# EAGLE board CT_schematic (EAGLE 7.6.0)

Size 100 x 80 mm. Coordinates in mm from the lower left corner, seen from the top.
Outline: 0,0 100,0 100,80 0,80 0,0
Copper layers (1*16): Top 0.035mm / dielectric 1.5mm / Bottom 0.035mm
Design rules "default": minimum track width 10mil, minimum drill 24mil, track to track 8mil, track to pad 8mil, pad to pad 8mil, via to via 8mil, smd to smd 8mil, copper to edge 40mil, drill to drill 8mil, minimum pad ring 10mil, minimum via ring 8mil, stop-mask expansion 4mil, vias tented up to drill 0mil, thermal gap 10mil

## Footprints (pad centres in the part's own frame; a part is rotated, then mirrored left to right if it is on the bottom)
C0603 = smd 0.8 x 0.8: 1 -0.762,0; 2 0.762,0
C0402 = smd 0.5 x 0.5: 1 -0.508,0; 2 0.508,0
C1210 = smd 1.2 x 2.5: 1 -1.524,0; 2 1.524,0
C0805 = smd 1.2 x 1.3: 1 -1.016,0; 2 1.016,0
C1206 = smd 1.3 x 1.6: 1 -1.524,0; 2 1.524,0
L0603 = smd 0.8 x 0.8: 1 -0.762,0; 2 0.762,0
DR1040 = smd 1.6 x 3.2: 1 -4.458,0; 2 4.458,0
R0603 = smd 0.8 x 0.8: 1 -0.762,0; 2 0.762,0
LQFP48 = smd 0.3 x 1.2: 1 -2.75,-4.25; 2 -2.25,-4.25; 3 -1.75,-4.25; 4 -1.25,-4.25; 5 -0.75,-4.25; 6 -0.25,-4.25; 7 0.25,-4.25; 8 0.75,-4.25; 9 1.25,-4.25; 10 1.75,-4.25; 11 2.25,-4.25; 12 2.75,-4.25; 25 2.75,4.25; 26 2.25,4.25; 27 1.75,4.25; 28 1.25,4.25; 29 0.75,4.25; 30 0.25,4.25; 31 -0.25,4.25; 32 -0.75,4.25; 33 -1.25,4.25; 34 -1.75,4.25; 35 -2.25,4.25; 36 -2.75,4.25 | smd 1.2 x 0.3: 13 4.25,-2.75; 14 4.25,-2.25; 15 4.25,-1.75; 16 4.25,-1.25; 17 4.25,-0.75; 18 4.25,-0.25; 19 4.25,0.25; 20 4.25,0.75; 21 4.25,1.25; 22 4.25,1.75; 23 4.25,2.25; 24 4.25,2.75; 37 -4.25,2.75; 38 -4.25,2.25; 39 -4.25,1.75; 40 -4.25,1.25; 41 -4.25,0.75; 42 -4.25,0.25; 43 -4.25,-0.25; 44 -4.25,-0.75; 45 -4.25,-1.25; 46 -4.25,-1.75; 47 -4.25,-2.25; 48 -4.25,-2.75
TST-110-05-T-D-RA = drill 1 pad 1.7 square: 1 0,0 | drill 1 pad 1.7: 2 0,2.54; 3 2.54,0; 4 2.54,2.54; 5 5.08,0; 6 5.08,2.54; 7 7.62,0; 8 7.62,2.54; 9 10.16,0; 10 10.16,2.54; 11 12.7,0; 12 12.7,2.54; 13 15.24,0; 14 15.24,2.54; 15 17.78,0; 16 17.78,2.54; 17 20.32,0; 18 20.32,2.54; 19 22.86,0; 20 22.86,2.54
TDFN-8/6MM = smd 0.3 x 0.75: 1 0,0; 2 0.5,0; 3 1,0; 4 1.5,0; 5 1.5,3; 6 1,3; 7 0.5,3; 8 0,3
FCI_10118193-0001LF = smd 0.4 x 1.35: 1 -1.3,2.675; 2 -0.65,2.675; 3 0,2.675; 4 0.65,2.675; 5 1.3,2.675 | smd 1.6 x 1.4: 6 -3.2,2.45; 7 3.2,2.45 | smd 1.9 x 1.9: 8 -1.2,0; 9 1.2,0 | hole 0.5: -3.3,0; 3.3,0
SOT143B = smd 1 x 0.7: 1 -0.75,-1 | smd 0.6 x 0.7: 2 0.95,-1; 3 0.95,1; 4 -0.95,1
QFN-28 = smd 0.813 x 0.305: 1 -2.451,1.5; 2 -2.451,1; 3 -2.451,0.5; 4 -2.451,0; 5 -2.451,-0.5; 6 -2.451,-1; 7 -2.451,-1.5; 15 2.451,-1.5; 16 2.451,-1; 17 2.451,-0.5; 18 2.451,0; 19 2.451,0.5; 20 2.451,1; 21 2.451,1.5 | smd 0.305 x 0.813: 8 -1.5,-2.451; 9 -1,-2.451; 10 -0.5,-2.451; 11 0,-2.451; 12 0.5,-2.451; 13 1,-2.451; 14 1.5,-2.451; 22 1.5,2.451; 23 1,2.451; 24 0.5,2.451; 25 0,2.451; 26 -0.5,2.451; 27 -1,2.451; 28 -1.5,2.451 | smd 3.607 x 3.607: 29 0,0
SJ-43515TS-SMT-TR = smd 2.2 x 3: 1 0.6,-7.4; 4 3.4,-7.4 | smd 3 x 3: 2 12.8,-7.4; 5 17,-3 | smd 2 x 3: 3 5.3,0; 6 2.5,0 | drill 1.8: P$7 4.5,-3.69; P$8 11.54,-3.69
ABS07-32.768KHZ-7-T = smd 1.1 x 2.4: 1 -2.5,0; 2 0,0
ABLS-25.000MHZ-B2F-T = smd 5.6 x 2.8: 1 -3.81,0; 2 5.69,0
ABLS-12.288MHZ-B4-T = smd 5.6 x 2.8: 1 -3.81,0; 2 5.69,0
TSOT-23-5 = smd 1.3 x 0.62: 1 -1.31,0.95; 2 -1.31,0; 3 -1.31,-0.95; 4 1.31,-0.95; 5 1.31,0.95
DFN8_2X3MC = smd 0.813 x 0.305: 1 -1.398,0.75; 2 -1.398,0.25; 3 -1.398,-0.25; 4 -1.398,-0.75; 5 1.398,-0.75; 6 1.398,-0.25; 7 1.398,0.25; 8 1.398,0.75 | smd 1.753 x 1.549: 9 0,0
JST-2-SMD = smd 1 x 4.6: 1 -1,-3.7; 2 1,-3.7 | smd 1.6 x 3.4: NC1 -3.4,1.5; NC2 3.4,1.5
SON-6 = smd 0.55 x 0.3: 1 -0.355,0.5 | smd 0.52 x 0.3: 2 -0.37,0; 3 -0.37,-0.5; 4 0.37,-0.5; 5 0.37,0; 6 0.37,0.5
SW_4-1437565-2 = smd 1.4 x 2.1: 1 -2.23,4.55; 2 -2.23,-4.55; 3 2.23,4.55; 4 2.23,-4.55
LGM67K-G1J2-24-Z = smd 0.8 x 1.4: A -2,0; C 0,0
NC7SZ125M5X = smd 1.3 x 0.7: 1 -1.3,0.95; 2 -1.3,0; 3 -1.3,-0.95; 4 1.3,-0.95; 5 1.3,0.95

## Placement (x,y rotation side)
C1  1e-07  [C0603]  -33.02,66.04 0 top  (outside the outline)
C2  1e-07  [C0603]  -36.83,66.04 0 top  (outside the outline)
C3  1e-07  [C0603]  -40.64,66.04 0 top  (outside the outline)
C4  1e-07  [C0603]  -44.45,66.04 0 top  (outside the outline)
C5  4.7e-06  [C0603]  -29.21,66.04 0 top  (outside the outline)
C6  1e-07  [C0603]  -48.26,66.04 0 top  (outside the outline)
C7  1e-08  [C0603]  -52.07,66.04 0 top  (outside the outline)
C8  1e-06  [C0603]  -55.88,66.04 0 top  (outside the outline)
C9  1e-11  [C0402]  -39.37,71.12 0 top  (outside the outline)
C10  1e-11  [C0402]  -43.18,71.12 0 top  (outside the outline)
C11  1e-11  [C0402]  -46.99,71.12 0 top  (outside the outline)
C12  1e-11  [C0402]  -50.8,71.12 0 top  (outside the outline)
C13  1e-07  [C0402]  -54.61,71.12 0 top  (outside the outline)
C14  1e-07  [C0402]  -58.42,71.12 0 top  (outside the outline)
C15  1e-08  [C0402]  -62.23,71.12 0 top  (outside the outline)
C16  2.2e-05  [C1210]  -38.1,48.26 0 top  (outside the outline)
C17  2.2e-05  [C1210]  -44.45,48.26 0 top  (outside the outline)
C18  1e-09  [C0402]  -66.04,71.12 0 top  (outside the outline)
C19  1e-09  [C0402]  -69.85,71.12 0 top  (outside the outline)
C20  1e-07  [C0402]  -73.66,71.12 0 top  (outside the outline)
C21  1e-07  [C0402]  -15.24,76.2 0 top  (outside the outline)
C22  1e-07  [C0402]  -19.05,76.2 0 top  (outside the outline)
C23  1e-07  [C0402]  -22.86,76.2 0 top  (outside the outline)
C24  1e-07  [C0402]  -26.67,76.2 0 top  (outside the outline)
C25  1e-05  [C0805]  -74.93,48.26 0 top  (outside the outline)
C26  1e-05  [C0805]  -15.24,55.88 0 top  (outside the outline)
C27  1e-05  [C0805]  -20.32,55.88 0 top  (outside the outline)
C28  1e-05  [C0805]  -25.4,55.88 0 top  (outside the outline)
C29  1e-05  [C0805]  -30.48,55.88 0 top  (outside the outline)
C30  2.2e-11  [C0402]  -31.75,71.12 0 top  (outside the outline)
C31  2.2e-11  [C0402]  -35.56,71.12 0 top  (outside the outline)
C32  1e-05  [C0805]  -35.56,55.88 0 top  (outside the outline)
C33  1e-05  [C0805]  -40.64,55.88 0 top  (outside the outline)
C34  1e-07  [C0402]  -30.48,76.2 0 top  (outside the outline)
C35  1e-05  [C1206]  -50.8,48.26 0 top  (outside the outline)
C36  1e-05  [C1206]  -57.15,48.26 0 top  (outside the outline)
C37  1e-08  [C0402]  -34.29,76.2 0 top  (outside the outline)
C38  1e-08  [C0402]  -38.1,76.2 0 top  (outside the outline)
F1  240.0  [L0603]  -59.69,66.04 0 top  (outside the outline)
I1  3.8e-06  [DR1040]  -38.1,20.32 0 top  (outside the outline)
R1  10000.0  [R0603]  -73.66,55.88 0 top  (outside the outline)
R2  1000.0  [R0603]  -63.5,66.04 0 top  (outside the outline)
R3  1600.5  [R0603]  -67.31,66.04 0 top  (outside the outline)
R4  4700.0  [R0603]  -71.12,66.04 0 top  (outside the outline)
R5  2200.0  [R0603]  -74.93,66.04 0 top  (outside the outline)
R6  2200.0  [R0603]  -15.24,71.12 0 top  (outside the outline)
R7  10000.0  [R0603]  -15.24,60.96 0 top  (outside the outline)
R8  10000.0  [R0603]  -20.32,60.96 0 top  (outside the outline)
R9  10000.0  [R0603]  -25.4,60.96 0 top  (outside the outline)
R10  10000.0  [R0603]  -30.48,60.96 0 top  (outside the outline)
R11  10000.0  [R0603]  -35.56,60.96 0 top  (outside the outline)
R12  10000.0  [R0603]  -40.64,60.96 0 top  (outside the outline)
R13  10000.0  [R0603]  -45.72,60.96 0 top  (outside the outline)
R14  10000.0  [R0603]  -50.8,60.96 0 top  (outside the outline)
R15  10000.0  [R0603]  -55.88,60.96 0 top  (outside the outline)
R16  10000.0  [R0603]  -60.96,60.96 0 top  (outside the outline)
R17  47000.0  [R0603]  -66.04,60.96 0 top  (outside the outline)
R18  47000.0  [R0603]  -71.12,60.96 0 top  (outside the outline)
R19  47000.0  [R0603]  -76.2,60.96 0 top  (outside the outline)
R20  680.0  [R0603]  -19.05,71.12 0 top  (outside the outline)
R21  220000.0  [R0603]  -58.42,55.88 0 top  (outside the outline)
R22  1000000.0  [R0603]  -53.34,55.88 0 top  (outside the outline)
R23  10000.0  [R0603]  -15.24,66.04 0 top  (outside the outline)
R24  10000.0  [R0603]  -20.32,66.04 0 top  (outside the outline)
R25  9100.0  [R0603]  -22.86,71.12 0 top  (outside the outline)
R26  680000.0  [R0603]  -63.5,55.88 0 top  (outside the outline)
R27  120000.0  [R0603]  -68.58,55.88 0 top  (outside the outline)
R28  2000.0  [R0603]  -26.67,71.12 0 top  (outside the outline)
R29  10000.0  [R0603]  -25.4,66.04 0 top  (outside the outline)
U1  STM32L152CCT6  [LQFP48]  -69.85,20.32 0 top  (outside the outline)
U2  TST-110-05-T-D-RA  [TST-110-05-T-D-RA]  -72.39,29.21 0 top  (outside the outline)
U3  24AA64T-I/MNY  [TDFN-8/6MM]  -24.13,31.75 0 top  (outside the outline)
U4  10118193-0001LF  [FCI_10118193-0001LF]  -33.02,31.75 0 top  (outside the outline)
U5  prtr5v0u2ax  [SOT143B]  -50.8,76.2 0 top  (outside the outline)
U6  WM8731CLSEFL  [QFN-28]  -30.48,49.53 0 top  (outside the outline)
U7  SJ-43515TS-SMT-TR  [SJ-43515TS-SMT-TR]  -39.37,10.16 0 top  (outside the outline)
U8  SJ-43515TS-SMT-TR  [SJ-43515TS-SMT-TR]  -67.31,10.16 0 top  (outside the outline)
U9  ABS07-32.768KHZ-7-T  [ABS07-32.768KHZ-7-T]  -69.85,41.91 0 top  (outside the outline)
U10  ABLS-25.000MHZ-B2F-T  [ABLS-25.000MHZ-B2F-T]  -26.67,41.91 0 top  (outside the outline)
U11  ABLS-12.288MHZ-B4-T  [ABLS-12.288MHZ-B4-T]  -46.99,41.91 0 top  (outside the outline)
U12  ltc3406es5  [TSOT-23-5]  -45.72,54.61 0 top  (outside the outline)
U13  MCP73831T-2ACI/MC  [DFN8_2X3MC]  -60.96,74.93 0 top  (outside the outline)
U14  S2B-PH-SM4-TB(LF)(SN)  [JST-2-SMD]  -53.34,21.59 0 top  (outside the outline)
U15  TPS3895ADRYR  [SON-6]  -54.61,74.93 0 top  (outside the outline)
U16  4-1437565-2  [SW_4-1437565-2]  -27.94,21.59 0 top  (outside the outline)
U17  Q65110A2395  [LGM67K-G1J2-24-Z]  -17.78,49.53 0 top  (outside the outline)
U18  nc7sz125m5x  [NC7SZ125M5X]  -62.23,48.26 0 top  (outside the outline)
U19  nc7sz125m5x  [NC7SZ125M5X]  -68.58,48.26 0 top  (outside the outline)

## Library data of the parts
C1-C38 F1 I1 R1-R29 U1-U19 = circuit_tree

## Nets
CLK_CRYSTAL_U1_3: C9.1 U1.3 U9.1
CLK_CRYSTAL_U1_4: C10.1 U1.4 U9.2
CLK_CRYSTAL_U1_5: C11.1 U1.5 U10.1
CLK_CRYSTAL_U1_6: C12.1 U1.6 U10.2
CLK_CRYSTAL_U6_1: C30.1 U6.1 U11.1
CLK_CRYSTAL_U6_2: C31.1 U6.2 U11.2
GND: C1.2 C2.2 C3.2 C4.2 C5.2 C6.2 C7.2 C8.2 C9.2 C10.2 C11.2 C12.2 C13.2 C14.2 C15.2 C19.2 C20.2 C21.2 C22.2 C23.2 C24.2 C25.2 C26.2 C27.2 C28.2 C29.2 C30.2 C31.2 C32.2 C33.1 C33.2 C34.2 C35.2 C36.2 C37.2 C38.2 R2.2 R7.2 R13.2 R15.2 R16.2 R17.2 R18.2 R19.2 R21.2 R25.2 R27.2 R28.2 U1.8 U1.23 U1.35 U1.47 U2.4 U2.6 U2.8 U2.10 U2.12 U2.14 U2.16 U2.18 U2.20 U3.4 U4.5 U4.6 U4.7 U4.8 U4.9 U5.1 U6.4 U6.15 U6.19 U6.25 U6.26 U6.29 U7.1 U8.1 U12.2 U13.6 U13.9 U14.2 U15.2 U17.C U18.2 U18.3 U19.1 U19.3
INPUT_USBPOWER_5V: C35.1 R29.2 U4.1 U5.4 U13.1 U13.2
NET_U1_1: C6.1 U1.1
NET_U1_7: R4.1 U1.7 U19.4
NET_U1_9: C7.1 C8.1 F1.1 U1.9
NET_U1_42: R5.1 U1.42 U3.6
NET_U1_43: R6.1 U1.43 U3.5
NET_U1_44: R7.1 U1.44
NET_U1_45: R3.1 U1.45 U17.A
NET_U1_46: R1.1 U1.46 U16.3 U16.4
NET_U2_19: R13.1 U2.19
NET_U3_1: R14.1 U3.1
NET_U3_2: R15.1 U3.2
NET_U3_3: R16.1 U3.3
NET_U6_9: U6.9
NET_U6_20: C24.1 C29.1 U6.20
NET_U7_2: C17.1 R18.1 U7.2
NET_U7_5: C16.1 R17.1 U7.5
NET_U7_13: C16.2
NET_U7_14: C17.2
NET_U8_5: C18.1 C19.1 R19.1 R20.1 U8.5
NET_U8_21: R20.2
NET_U8_22: C18.2
NET_U12_1: U12.1
NET_U12_3: I1.1 U12.3
NET_U12_5: R21.1 R22.1 U12.5
NET_U12_ATNET_3: I1.2 R22.2
NET_U13_5: R29.1 U13.5
NET_U13_8: R28.1 U13.8
NET_U15_1: R24.1 R25.1 U15.1
NET_U15_3: R26.2 R27.1 U15.3
NET_U15_4: R23.1 U15.4 U18.4 U19.2
NET_U16_1: R2.1 U16.1 U16.2
PROC_I2S2_CK: U1.26 U6.7
PROC_I2S2_SD: U1.28 U6.8
PROC_I2S2_WS: U1.25 U6.9 U6.11
PROC_SYS_JTCK_SWCLK: R11.1 U1.37 U2.9
PROC_SYS_JTDI: R9.1 U1.38 U2.5
PROC_SYS_JTDO_TRACESWO: U1.39 U2.13
PROC_SYS_JTMS_SWDIO: R10.1 U1.34 U2.7
PROC_SYS_JTRST: R8.1 U1.40 U2.3
PROC_USB_DM: U1.32 U4.2 U5.3
PROC_USB_DP: U1.33 U4.3 U5.2
RST_OUT_U2_SRESET_B: R12.1 U2.15 U18.1
VCC_S1_3V7: C32.1 C36.1 U12.4 U13.3 U13.4 U14.1
VCC_TIER1_3V3: C1.1 C2.1 C3.1 C4.1 C5.1 C13.1 C14.1 C15.1 C20.1 C21.1 C22.1 C23.1 C25.1 C26.1 C27.1 C28.1 C33.2 C34.1 C37.1 C38.1 F1.2 I1.2 R1.2 R3.2 R4.2 R5.2 R6.2 R8.2 R9.2 R10.2 R11.2 R12.2 R14.2 R22.2 R23.2 R24.2 R26.1 U1.24 U1.36 U1.48 U2.1 U2.2 U3.7 U3.8 U6.3 U6.5 U6.12 U6.18 U15.6 U18.5 U19.5

## Tracks (layer width: path | path; a pad name or v marks a point on that pad's centre or on a via)
CLK_CRYSTAL_U1_3  (2 unrouted)
CLK_CRYSTAL_U1_4  (2 unrouted)
CLK_CRYSTAL_U1_5  (2 unrouted)
CLK_CRYSTAL_U1_6  (2 unrouted)
CLK_CRYSTAL_U6_1  (2 unrouted)
CLK_CRYSTAL_U6_2  (2 unrouted)
GND  (85 unrouted)
INPUT_USBPOWER_5V  (5 unrouted)
NET_U1_1  (1 unrouted)
NET_U1_7  (2 unrouted)
NET_U1_9  (3 unrouted)
NET_U1_42  (2 unrouted)
NET_U1_43  (2 unrouted)
NET_U1_44  (1 unrouted)
NET_U1_45  (2 unrouted)
NET_U1_46  (3 unrouted)
NET_U2_19  (1 unrouted)
NET_U3_1  (1 unrouted)
NET_U3_2  (1 unrouted)
NET_U3_3  (1 unrouted)
NET_U6_20  (2 unrouted)
NET_U7_2  (2 unrouted)
NET_U7_5  (2 unrouted)
NET_U8_5  (4 unrouted)
NET_U12_3  (1 unrouted)
NET_U12_5  (2 unrouted)
NET_U12_ATNET_3  (1 unrouted)
NET_U13_5  (1 unrouted)
NET_U13_8  (1 unrouted)
NET_U15_1  (2 unrouted)
NET_U15_3  (2 unrouted)
NET_U15_4  (3 unrouted)
NET_U16_1  (2 unrouted)
PROC_I2S2_CK  (1 unrouted)
PROC_I2S2_SD  (1 unrouted)
PROC_I2S2_WS  (2 unrouted)
PROC_SYS_JTCK_SWCLK  (2 unrouted)
PROC_SYS_JTDI  (2 unrouted)
PROC_SYS_JTDO_TRACESWO  (1 unrouted)
PROC_SYS_JTMS_SWDIO  (2 unrouted)
PROC_SYS_JTRST  (2 unrouted)
PROC_USB_DM  (2 unrouted)
PROC_USB_DP  (2 unrouted)
RST_OUT_U2_SRESET_B  (2 unrouted)
VCC_S1_3V7  (5 unrouted)
VCC_TIER1_3V3  (50 unrouted)